# EAGLE board espmarauder_production (EAGLE 9.6.2), part 1 of 2
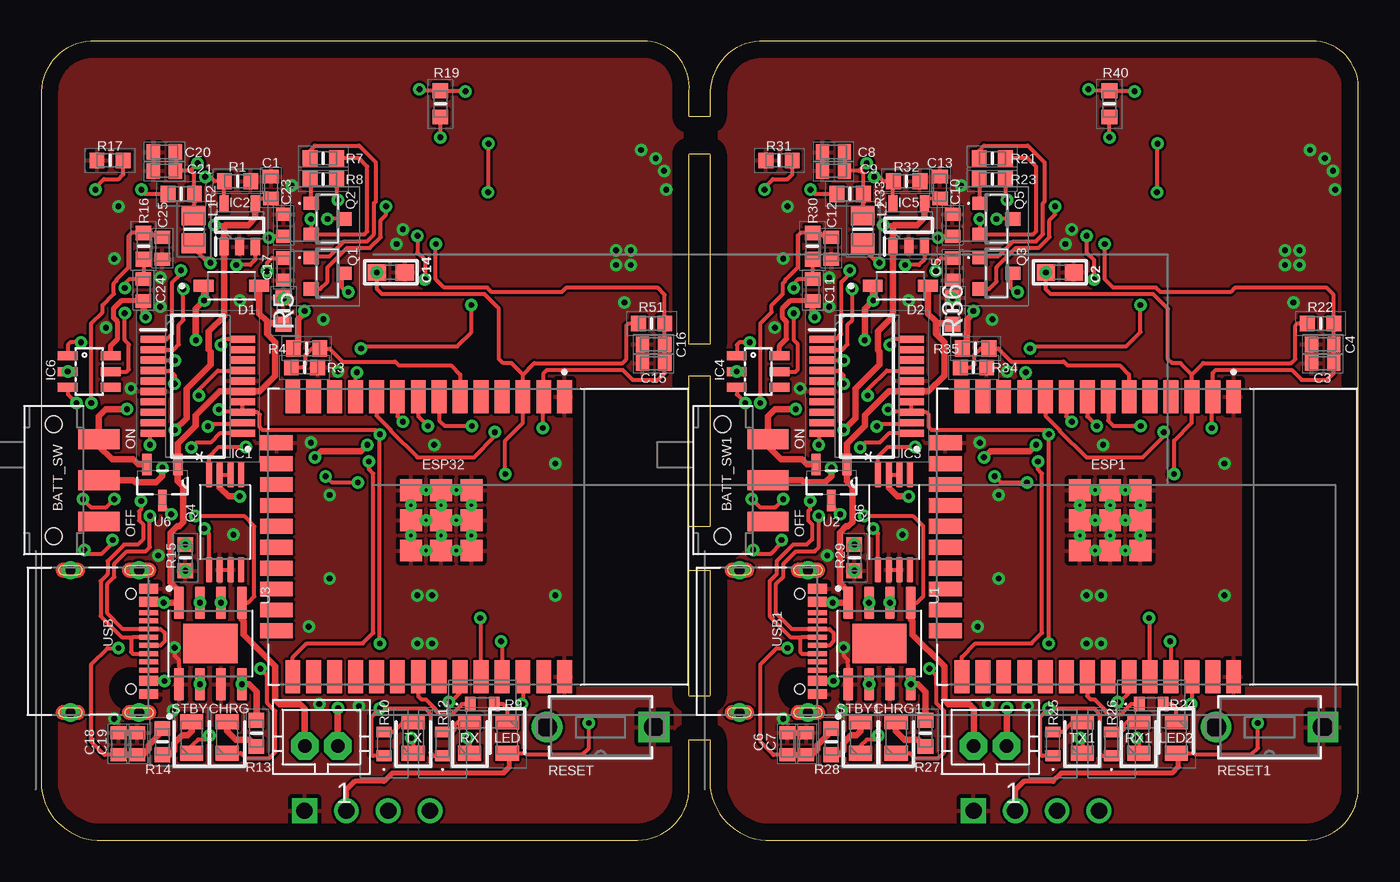
[diagram p0: board, top side]
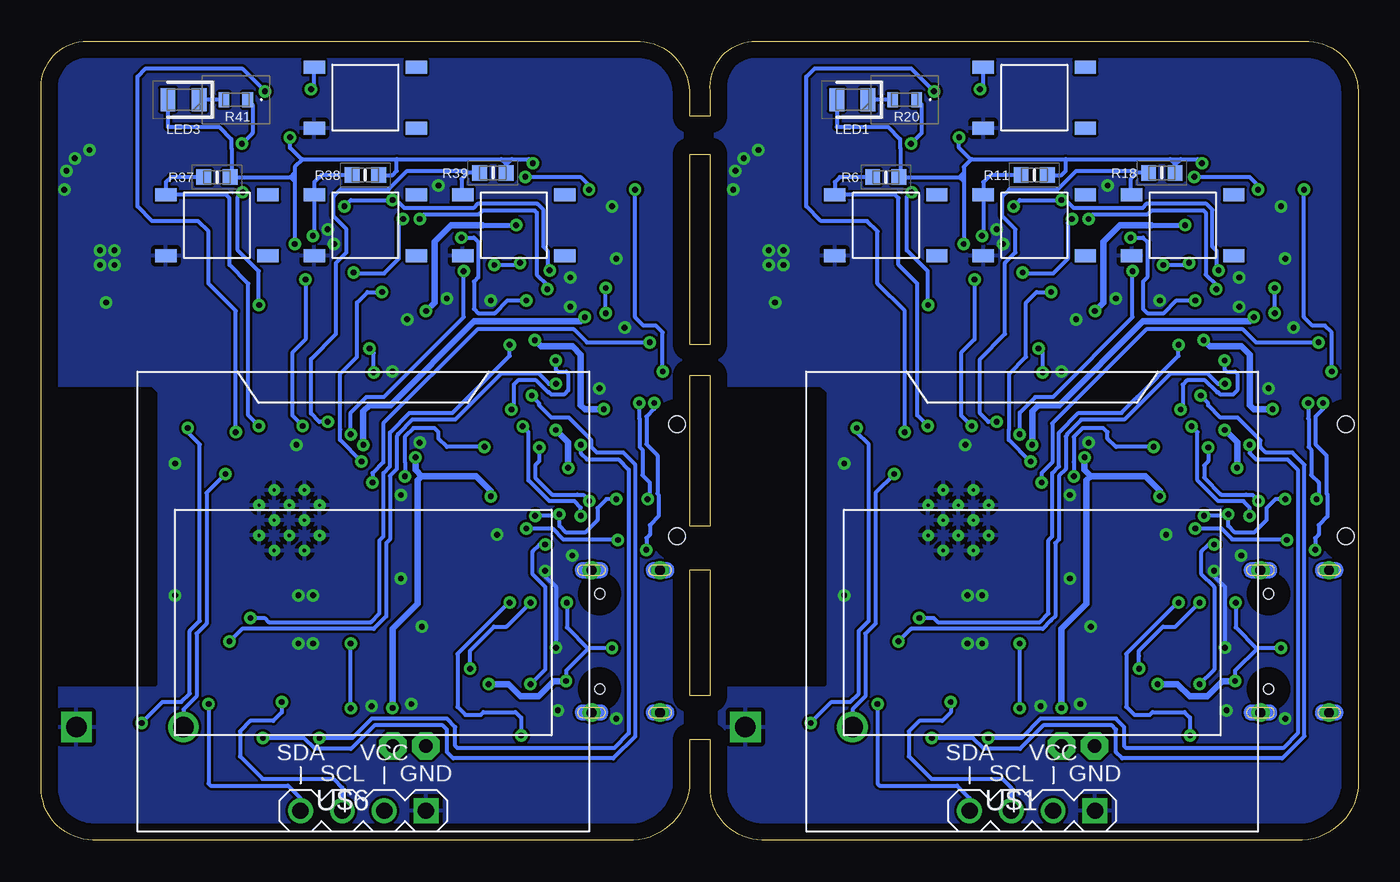
[diagram p1: board, bottom side, seen from below]

Size 80.02 x 48.54 mm. Coordinates in mm from the lower left corner, seen from the top.
Outline: 0,45.49 0,3.2 arc90 4.06,0.03 35.94,0.03 arc90 39.37,2.95 39.37,6.12 40.64,6.12 40.64,3.2 arc90 44.7,0.03 76.58,0.03 arc90 80.01,2.95 80.01,45.49 arc90 77.47,48.54 43.94,48.54 arc90 40.64,45.49 40.64,43.97 39.37,43.97 39.37,45.49 arc90 36.83,48.54 3.3,48.54 arc90 0,45.49
Outline: 39.37,8.79 39.37,16.41 40.64,16.41 40.64,8.79 39.37,8.79
Outline: 39.37,19.08 39.37,28.22 40.64,28.22 40.64,19.08 39.37,19.08
Outline: 39.37,30.12 39.37,41.68 40.64,41.68 40.64,30.12 39.37,30.12
Copper layers (1*16): Top 0.035mm / dielectric 1.5mm / Bottom 0.035mm
Design rules "default *": minimum track width 6mil, minimum drill 0.35mm, track to track 6mil, track to pad 6mil, pad to pad 6mil, via to via 6mil, smd to smd 6mil, copper to edge 40mil, drill to drill 6mil, minimum pad ring 10mil, minimum via ring 8mil, stop-mask expansion 4mil, vias tented up to drill 0.36mm, thermal gap 10mil
Net classes: 1 highpower: width 0.406 mm, drill 0.483 mm

## Footprints (pad centres in the part's own frame; a part is rotated, then mirrored left to right if it is on the bottom)
SW_JS102011SAQN = smd 1.2 x 2.5: 1 -2.5,2.75; 2 0,2.75; 3 2.5,2.75 | hole 1: -3.4,0; 3.4,0
CAPC1608X87N = smd 0.8 x 0.94: 1 -0.67,0; 2 0.67,0
0603 = smd 1.1 x 1: 1 -0.85,0; 2 0.85,0
LEDC2012X80N = smd 0.9 x 1.4: 1 -0.95,0; 2 0.95,0
SOD3715X145N = smd 1.21 x 0.73: A 1.68,0; C -1.68,0
MODULE_ESP32-WROOM-32D = smd 2 x 0.9: 1 -8.5,5.26; 2 -8.5,3.99; 3 -8.5,2.72; 4 -8.5,1.45; 5 -8.5,0.18; 6 -8.5,-1.09; 7 -8.5,-2.36; 8 -8.5,-3.63; 9 -8.5,-4.9; 10 -8.5,-6.17; 11 -8.5,-7.44; 12 -8.5,-8.71; 13 -8.5,-9.98; 14 -8.5,-11.25; 25 8.5,-11.25; 26 8.5,-9.98; 27 8.5,-8.71; 28 8.5,-7.44; 29 8.5,-6.17; 30 8.5,-4.9; 31 8.5,-3.63; 32 8.5,-2.36; 33 8.5,-1.09; 34 8.5,0.18; 35 8.5,1.45; 36 8.5,2.72; 37 8.5,3.99; 38 8.5,5.26 | smd 0.9 x 2: 15 -5.715,-12.25; 16 -4.445,-12.25; 17 -3.175,-12.25; 18 -1.905,-12.25; 19 -0.635,-12.25; 20 0.635,-12.25; 21 1.905,-12.25; 22 3.175,-12.25; 23 4.445,-12.25; 24 5.715,-12.25 | smd 1.33 x 1.33: 39_1 -2.835,-0.405; 39_2 -1,-0.405; 39_3 0.835,-0.405; 39_4 -2.835,-2.24; 39_5 -1,-2.24; 39_6 0.835,-2.24; 39_7 -2.835,-4.075; 39_8 -1,-4.075; 39_9 0.835,-4.075 | drill 0.2 pad 0.3: 39_10 -1.917,-0.405; 39_11 -0.083,-0.405; 39_12 -2.835,-1.323; 39_13 -1,-1.323; 39_14 0.835,-1.323; 39_15 -1.917,-2.24; 39_16 -0.083,-2.24; 39_17 -2.835,-3.158; 39_18 -1,-3.158; 39_19 0.835,-3.158; 39_20 -1.917,-4.075; 39_21 -0.083,-4.075
SOP64P599X175-20N = smd 1.526 x 0.435: 1 -2.712,2.858; 2 -2.712,2.222; 3 -2.712,1.588; 4 -2.712,0.952; 5 -2.712,0.318; 6 -2.712,-0.318; 7 -2.712,-0.952; 8 -2.712,-1.588; 9 -2.712,-2.222; 10 -2.712,-2.858; 11 2.712,-2.858; 12 2.712,-2.222; 13 2.712,-1.588; 14 2.712,-0.952; 15 2.712,-0.318; 16 2.712,0.318; 17 2.712,0.952; 18 2.712,1.588; 19 2.712,2.222; 20 2.712,2.858
SOT95P280X100-5N = smd 1.05 x 0.55: 1 -1.3,0.95; 2 -1.3,0; 3 -1.3,-0.95; 4 1.3,-0.95; 5 1.3,0.95
SOT23-6 = smd 0.55 x 1.2: 1 -0.95,-1.3; 2 0,-1.3; 3 0.95,-1.3; 4 0.95,1.3; 5 0,1.3; 6 -0.95,1.3
INDC2012X105N = smd 1.2 x 1.45: 1 -0.85,0; 2 0.85,0
JST-PH2 = drill 0.813 pad 1.676 octagon: 1 1,0; 2 -1,0
SI2305TP = smd 0.8 x 0.9: 1 -0.95,-1; 2 0.95,-1; 3 0,1
SOP65P640X120-8N = smd 1.56 x 0.4: 1 -2.88,0.975; 2 -2.88,0.325; 3 -2.88,-0.325; 4 -2.88,-0.975; 5 2.88,-0.975; 6 2.88,-0.325; 7 2.88,0.325; 8 2.88,0.975
RESC1608X55N = smd 0.9 x 0.95: 1 -0.8,0; 2 0.8,0
RESC1608X55N' = smd 0.9 x 1: 1 -0.8,0; 2 0.8,0
ERJH3 = smd 0.65 x 0.9: 1 -0.725,0; 2 0.725,0
SWDIP2_256X170P100 = drill 1.245 pad 1.753 square: 1 -6.502,0 | drill 1.245 pad 1.753: 2 0,0
SOP127P600X175-9N = smd 1.97 x 0.6: 1 -2.475,1.905; 2 -2.475,0.635; 3 -2.475,-0.635; 4 -2.475,-1.905; 5 2.475,-1.905; 6 2.475,-0.635; 7 2.475,0.635; 8 2.475,1.905 | smd 2.413 x 3.302: 9 0,0
SOT95P237X112-3N = smd 1.321 x 0.559: 1 -1.092,0.94; 2 -1.092,-0.94 | smd 1.321 x 0.508: 3 1.092,0
DISPLAY-OLED-128X64-I2C = drill 1 square: 1 -3.81,12.7 | drill 1: 2 -1.27,12.7; 3 1.27,12.7; 4 3.81,12.7
BUTTON4X4 = smd 1.3 x 0.8: 1 -3.1,1.85; 2 3.1,1.85; 3 -3.1,-1.85; 4 3.1,-1.85
HRO_TYPE-C-31-M-12 = smd 0.6 x 1.14: A1_B12 -3.2,4.75; A4_B9 -2.4,4.75; B1_A12 3.2,4.75; B4_A9 2.4,4.75 | smd 0.3 x 1.14: A5 -1.25,4.75; A6 -0.25,4.75; A7 0.25,4.75; A8 1.25,4.75; B5 1.75,4.75; B6 0.75,4.75; B7 -0.75,4.75; B8 -1.75,4.75 | drill 0.6 pad 0.9: S1 -4.325,4.17; S2 4.325,4.17; S3 -4.325,0; S4 4.325,0 | hole 0.6: -2.89,3.68; 2.89,3.68

## Placement (x,y rotation side)
BATT_SW  JS102011SAQN  [SW_JS102011SAQN]  0.76,21.87 270 top
BATT_SW1  JS102011SAQN  [SW_JS102011SAQN]  41.4,21.87 270 top
C1  100nf  [CAPC1608X87N]  13.97,39.65 270 top
C2  1uF  [0603]  61.89,34.49 0 top
C3  100nf  [CAPC1608X87N]  77.85,28.98 0 top
C4  10nf  [CAPC1608X87N]  77.85,30.12 0 top
C5  100nf  [CAPC1608X87N]  55.37,34.7 270 top
C6  100nf  [CAPC1608X87N]  45.34,5.87 270 top
C7  100nf  [CAPC1608X87N]  46.48,5.87 90 top
C8  1uf  [CAPC1608X87N]  48.13,41.81 0 top
C9  10nf  [CAPC1608X87N]  48.13,40.67 0 top
C10  100nf  [CAPC1608X87N]  55.37,37.36 270 top
C11  100nf  [CAPC1608X87N]  46.86,33.43 90 top
C12  100nf  [CAPC1608X87N]  48.01,35.97 90 top
C13  100nf  [CAPC1608X87N]  54.61,39.65 270 top
C14  1uF  [0603]  21.25,34.49 0 top
C15  100nf  [CAPC1608X87N]  37.21,28.98 0 top
C16  10nf  [CAPC1608X87N]  37.21,30.12 0 top
C17  100nf  [CAPC1608X87N]  14.73,34.7 270 top
C18  100nf  [CAPC1608X87N]  4.7,5.87 270 top
C19  100nf  [CAPC1608X87N]  5.84,5.87 90 top
C20  1uf  [CAPC1608X87N]  7.49,41.81 0 top
C21  10nf  [CAPC1608X87N]  7.49,40.67 0 top
C23  100nf  [CAPC1608X87N]  14.73,37.36 270 top
C24  100nf  [CAPC1608X87N]  6.22,33.43 90 top
C25  100nf  [CAPC1608X87N]  7.37,35.97 90 top
CHRG  Green  [LEDC2012X80N]  11.3,6.25 90 top
CHRG1  Green  [LEDC2012X80N]  51.94,6.25 90 top
D1  1N5819HW-7  [SOD3715X145N]  11.56,33.68 0 top
D2  1N5819HW-7  [SOD3715X145N]  52.2,33.68 0 top
ESP1  ESP32-WROOM-32D  [MODULE_ESP32-WROOM-32D]  67.18,18.44 270 top
ESP32  ESP32-WROOM-32D  [MODULE_ESP32-WROOM-32D]  26.54,18.44 270 top
IC1  FT231XS-R  [SOP64P599X175-20N]  9.53,27.58 0 top
IC2  M3406-ADJ  [SOT95P280X100-5N]  12.06,37.36 90 top
IC3  FT231XS-R  [SOP64P599X175-20N]  50.16,27.58 0 top
IC4  DW01A  [SOT23-6]  43.56,28.47 270 top
IC5  M3406-ADJ  [SOT95P280X100-5N]  52.71,37.36 90 top
IC6  DW01A  [SOT23-6]  2.92,28.47 270 top
L1  MLF2012A2R2KT000  [INDC2012X105N]  9.27,37.11 90 top
L2  MLF2012A2R2KT000  [INDC2012X105N]  49.91,37.11 90 top
LED  Green  [LEDC2012X80N]  28.32,6.25 270 top
LED1  Green  [LEDC2012X80N]  30.73,44.98 180 bottom
LED2  Green  [LEDC2012X80N]  68.96,6.25 270 top
LED3  Green  [LEDC2012X80N]  71.37,44.98 180 bottom
P1  [JST-PH2]  17.02,5.74 0 top
P2  [JST-PH2]  57.66,5.74 0 top
Q1  MMBT3904-TP  [SI2305TP]  17.4,34.44 270 top
Q2  MMBT3904-TP  [SI2305TP]  17.4,37.74 270 top
Q3  MMBT3904-TP  [SI2305TP]  58.04,34.44 270 top
Q4  FS8205A  [SOP65P640X120-8N]  11.18,19.33 270 top
Q5  MMBT3904-TP  [SI2305TP]  58.04,37.74 270 top
Q6  FS8205A  [SOP65P640X120-8N]  51.82,19.33 270 top
R1  10k  [RESC1608X55N]  11.94,40.03 0 top
R2  40k2  [RESC1608X55N']  8.51,39.27 0 top
R3  10k  [RESC1608X55N]  16,28.73 0 top
R4  40k2  [RESC1608X55N']  16.13,29.87 180 top
R5  10k  [RESC1608X55N]  14.73,32.16 270 top
R6  10k  [RESC1608X55N]  28.7,40.28 0 bottom
R7  10k  [RESC1608X55N]  17.15,40.16 180 top
R8  10k  [RESC1608X55N]  17.15,41.43 180 top
R9  330  [ERJH3]  26.8,8.28 0 top
R10  330  [ERJH3]  20.83,5.87 90 top
R11  10k  [RESC1608X55N]  19.68,40.41 0 bottom
R12  330  [ERJH3]  24.38,5.87 90 top
R13  1k  [RESC1608X55N]  13.08,6.5 270 top
R14  1k  [RESC1608X55N]  7.37,5.99 270 top
R15  1.2k  [RESC1608X55N]  8.76,17.17 90 top
R16  100  [RESC1608X55N]  6.22,36.09 90 top
R17  1k  [RESC1608X55N]  4.19,41.3 0 top
R18  10k  [RESC1608X55N]  11.94,40.54 0 bottom
R19  10k  [RESC1608X55N]  24.26,44.73 270 top
R20  330  [ERJH3]  27.56,44.98 180 bottom
R21  10k  [RESC1608X55N]  57.79,40.16 180 top
R22  10k  [RESC1608X55N]  77.72,31.39 180 top
R23  10k  [RESC1608X55N]  57.79,41.43 180 top
R24  330  [ERJH3]  67.44,8.28 0 top
R25  330  [ERJH3]  61.47,5.87 90 top
R26  330  [ERJH3]  65.02,5.87 90 top
R27  1k  [RESC1608X55N]  53.72,6.5 270 top
R28  1k  [RESC1608X55N]  48.01,5.99 270 top
R29  1.2k  [RESC1608X55N]  49.4,17.17 90 top
R30  100  [RESC1608X55N]  46.86,36.09 90 top
R31  1k  [RESC1608X55N]  44.83,41.3 0 top
R32  10k  [RESC1608X55N]  52.58,40.03 0 top
R33  40k2  [RESC1608X55N']  49.15,39.27 0 top
R34  10k  [RESC1608X55N]  56.64,28.73 0 top
R35  40k2  [RESC1608X55N']  56.77,29.87 180 top
R36  10k  [RESC1608X55N]  55.37,32.16 270 top
R37  10k  [RESC1608X55N]  69.34,40.28 0 bottom
R38  10k  [RESC1608X55N]  60.32,40.41 0 bottom
R39  10k  [RESC1608X55N]  52.58,40.54 0 bottom
R40  10k  [RESC1608X55N]  64.9,44.73 270 top
R41  330  [ERJH3]  68.2,44.98 180 bottom
R51  10k  [RESC1608X55N]  37.08,31.39 180 top
RESET  1825966-1  [SWDIP2_256X170P100]  30.73,6.88 180 top
RESET1  1825966-1  [SWDIP2_256X170P100]  71.37,6.88 180 top
RX  Green  [LEDC2012X80N]  26.03,6.25 90 top
RX1  Green  [LEDC2012X80N]  66.68,6.25 90 top
STBY  Green  [LEDC2012X80N]  9.14,6.25 90 top
STBY1  Green  [LEDC2012X80N]  49.78,6.25 90 top
TX  Green  [LEDC2012X80N]  22.61,6.25 90 top
TX1  Green  [LEDC2012X80N]  63.25,6.25 90 top
U1  TP4056  [SOP127P600X175-9N]  50.93,11.96 90 top
U2  SI2301BDS-T1-E3  [SOT95P237X112-3N]  48.01,21.74 270 top
U3  TP4056  [SOP127P600X175-9N]  10.29,11.96 90 top
U6  SI2301BDS-T1-E3  [SOT95P237X112-3N]  7.37,21.74 270 top
U$1  DISPLAY-OLED-128X64-I2C  [DISPLAY-OLED-128X64-I2C]  19.81,14.5 180 bottom
U$2  BUTTON4X4  [BUTTON4X4]  28.7,37.36 0 bottom
U$3  BUTTON4X4  [BUTTON4X4]  19.68,37.36 0 bottom
U$4  BUTTON4X4  [BUTTON4X4]  10.67,37.36 0 bottom
U$5  BUTTON4X4  [BUTTON4X4]  19.68,45.11 0 bottom
U$6  DISPLAY-OLED-128X64-I2C  [DISPLAY-OLED-128X64-I2C]  60.45,14.5 180 bottom
U$7  BUTTON4X4  [BUTTON4X4]  69.34,37.36 0 bottom
U$8  BUTTON4X4  [BUTTON4X4]  60.32,37.36 0 bottom
U$9  BUTTON4X4  [BUTTON4X4]  51.31,37.36 0 bottom
U$10  BUTTON4X4  [BUTTON4X4]  60.32,45.11 0 bottom
USB  TYPE-C-31-M-12  [HRO_TYPE-C-31-M-12]  1.78,12.09 270 top
USB1  TYPE-C-31-M-12  [HRO_TYPE-C-31-M-12]  42.42,12.09 270 top

## Library data of the parts
BATT_SW BATT_SW1 = JS102011SAQN; AVAILABILITY: In Stock; CHECK_PRICES: https://www.snapeda.com/parts/JS102011SAQN/C%2526K/view-part/?ref=eda; DESCRIPTION: Slide Switch SPDT Surface Mount, Right Angle; MF: C&K; MP: JS102011SAQN; PACKAGE: None; PRICE: None; PURCHASE-URL: https://pricing.snapeda.com/search?q=JS102011SAQN&ref=eda; SNAPEDA_LINK: https://www.snapeda.com/parts/JS102011SAQN/C%2526K/view-part/?ref=snap
C1 C3 C5-C8 C10-C13 C15 C17-C20 C23-C25 = AccesControlNFC; DESCRIPTION: Wurth Elektronik 0603 WCAP-CSGP 100nF Ceramic Multilayer Capacitor, 25 V dc, +125C, X7R Dielectric, +/-10%; DIGIKEY_PARTNUMBER: 732-7989-1-ND; DIGIKEY_PRICE-STOCK: https://www.digikey.com/product-detail/en/w%C3%BCrth-elektronik/885012206071/732-7989-1-ND/5454616; HEIGHT: 0.87mm; MANUFACTURER_NAME: Wurth Elektronik; MANUFACTURER_PART_NUMBER: 885012206071; MOUSER_PART_NUMBER: 710-885012206071; MOUSER_PRICE-STOCK: https://www.mouser.co.uk/ProductDetail/Wurth-Elektronik/885012206071?qs=0KOYDY2FL2%2FEBQkuHgvarg%3D%3D
C2 C14 = microbuilder
C4 C9 C16 C21 = AccesControlNFC; DESCRIPTION: Wurth Elektronik 0603 WCAP-CSGP 10nF Ceramic Multilayer Capacitor, 50 V dc, +125C, X7R Dielectric, +/-10%; DIGIKEY_PARTNUMBER: 732-8007-1-ND; DIGIKEY_PRICE-STOCK: https://www.digikey.com/product-detail/en/w%C3%BCrth-elektronik/885012206089/732-8007-1-ND/5454634; HEIGHT: 0.87mm; MANUFACTURER_NAME: Wurth Elektronik; MANUFACTURER_PART_NUMBER: 885012206089; MOUSER_PART_NUMBER: 710-885012206089; MOUSER_PRICE-STOCK: https://www.mouser.co.uk/ProductDetail/Wurth-Elektronik/885012206089?qs=0KOYDY2FL28GvSbKh319Tw%3D%3D
CHRG CHRG1 LED LED1-LED3 RX RX1 STBY STBY1 TX TX1 = AccesControlNFC; DESCRIPTION: LED,Wurth Elektronik,150080BS75000 Wurth Elektronik 150080BS75000, WL-SMCW Series Blue LED, 470 nm 2012 (0805) Clear, Rectangle Lens SMD package; HEIGHT: 0.8mm; MANUFACTURER_NAME: Wurth Elektronik; MANUFACTURER_PART_NUMBER: 150080BS75000; MOUSER_PART_NUMBER: 710-150080BS75000; MOUSER_PRICE-STOCK: https://www.mouser.co.uk/ProductDetail/Wurth-Elektronik/150080BS75000?qs=2kOmHSv6VfT2tBo3UPVqAQ%3D%3D
D1 D2 = 1N5819HW-7; AVAILABILITY: In Stock; CHECK_PRICES: https://www.snapeda.com/parts/1N5819HW-7/Diodes+Inc./view-part/?ref=eda; DESCRIPTION: Diode Schottky 40 V 1A Surface Mount SOD-123; MF: Diodes Inc.; MP: 1N5819HW-7; PACKAGE: SOD-123 Fairchild Semiconductor; PRICE: None; PURCHASE-URL: https://www.snapeda.com/api/url_track_click_mouser/?unipart_id=51510&manufacturer=Diodes Inc.&part_name=1N5819HW-7&search_term=1n5819; SNAPEDA_LINK: https://www.snapeda.com/parts/1N5819HW-7/Diodes+Inc./view-part/?ref=snap
ESP1 ESP32 = AccesControlNFC; AVAILABILITY: In Stock; DESCRIPTION: Bluetooth, WiFi 802.11b/g/n, Bluetooth v4.2 +EDR, Class 1, 2 and 3 Transceiver Module 2.4GHz ~ 2.5GHz Integrated; MF: Espressif Systems; MP: ESP32-WROOM-32D; PACKAGE: Module Espressif Systems; PRICE: None; PURCHASE-URL: https://pricing.snapeda.com/search/part/ESP32-WROOM-32D/?ref=eda
IC1 IC3 = AccesControlNFC; DESCRIPTION: FTDI Chip FT231XS-R, Interface RS232, RS422, RS485, SIE, UART 3MBd, 5 V, 20-pin, SSOP; HEIGHT: 1.753mm; MANUFACTURER_NAME: FTDI Chip; MANUFACTURER_PART_NUMBER: FT231XS-R; MOUSER_PART_NUMBER: 895-FT231XS-R; MOUSER_PRICE-STOCK: https://www.mouser.co.uk/ProductDetail/FTDI/FT231XS-R?qs=Gp1Yz1mis3WduRPsgrTbtg%3D%3D
IC2 IC5 = M3406; DESCRIPTION: Step-down type SOT-23-5 DC-DC Converters ROHS; HEIGHT: 1mm; LCSC_PART_NUMBER: C83224; LCSC_PRICE-STOCK: https://www.lcsc.com/product-detail/DC-DC-Converters_XI-AN-Aerosemi-Tech-M3406-ADJ_C83224.html; MANUFACTURER_NAME: XI'AN Aerosemi Tech; MANUFACTURER_PART_NUMBER: M3406-ADJ
IC4 IC6 = DW01A; AVAILABILITY: Not in stock; CHECK_PRICES: https://www.snapeda.com/parts/DW01A/Fortune+Semiconductor/view-part/?ref=eda; DESCRIPTION: One Cell Lithium-ion/Polymer Battery Protection IC; MF: Fortune Semiconductor; MP: DW01A; PACKAGE: SOT-23-6 Fortune Semiconductor; PRICE: None; SNAPEDA_LINK: https://www.snapeda.com/parts/DW01A/Fortune+Semiconductor/view-part/?ref=snap
L1 L2 = MLF2012A2R2KT000; DESCRIPTION: 2.2 H Shielded Multilayer Inductor 50 mA 500mOhm Max 0805 (2012 Metric); HEIGHT: 1.05mm; MANUFACTURER_NAME: TDK; MANUFACTURER_PART_NUMBER: MLF2012A2R2KT000; MOUSER_PART_NUMBER: 810-MLF2012A2R2KT000; MOUSER_PRICE-STOCK: https://www.mouser.co.uk/ProductDetail/TDK/MLF2012A2R2KT000?qs=pLY5GE0xrmL3Y2Jw%2FEGjFg%3D%3D
P1 P2 = jst-ph
Q1-Q3 Q5 = AccesControlNFC; DESCRIPTION: Bipolar Transistors - BJT 40V; HEIGHT: mm; MANUFACTURER_NAME: Micro Commercial Components (MCC); MANUFACTURER_PART_NUMBER: MMBT3904-TP; MOUSER_PART_NUMBER: 833-MMBT3904-TP; MOUSER_PRICE-STOCK: https://www.mouser.co.uk/ProductDetail/Micro-Commercial-Components-MCC/MMBT3904-TP?qs=KFo7JewZbUHicjDjIayULQ%3D%3D
Q4 Q6 = FS8205A; AVAILABILITY: Not in stock; CHECK_PRICES: https://www.snapeda.com/parts/FS8205A/Fortune+Semiconductor/view-part/?ref=eda; MF: Fortune Semiconductor; MP: FS8205A; PACKAGE: Package; PRICE: None; SNAPEDA_LINK: https://www.snapeda.com/parts/FS8205A/Fortune+Semiconductor/view-part/?ref=snap
R1 R3 R5-R8 R11 R18 R19 R21-R23 R32 R34 R36-R40 R51 = AccesControlNFC; DESCRIPTION: Thick Film Resistors - SMD 0603 10Kohm 5% Anti Surge AEC-Q200; DIGIKEY_PARTNUMBER: RHM10KDCT-ND; DIGIKEY_PRICE-STOCK: https://www.digikey.com/product-detail/en/rohm-semiconductor/ESR03EZPJ103/RHM10KDCT-ND/1762925; HEIGHT: 0.55mm; MANUFACTURER_NAME: ROHM Semiconductor; MANUFACTURER_PART_NUMBER: ESR03EZPJ103; MOUSER_PART_NUMBER: 755-ESR03EZPJ103; MOUSER_PRICE-STOCK: https://www.mouser.com/Search/Refine.aspx?Keyword=755-ESR03EZPJ103
R2 R4 R33 R35 = ERJ-S03F4022V; DESCRIPTION: Thick Film Resistors - SMD 0603 40.2Kohms 1% Anti-Sulfur; HEIGHT: 0.55mm; MANUFACTURER_NAME: Panasonic; MANUFACTURER_PART_NUMBER: ERJ-S03F4022V; MOUSER_PART_NUMBER: 667-ERJ-S03F4022V; MOUSER_PRICE-STOCK: https://www.mouser.com/Search/Refine.aspx?Keyword=667-ERJ-S03F4022V
R9 R10 R12 R20 R24-R26 R41 = AccesControlNFC; DESCRIPTION: Power Rating 0.125W,Resistance 330 Ohm,LxW(EIA) 1.6 x 0.8 (EIA:0603) mm; HEIGHT: mm; MANUFACTURER_NAME: Panasonic; MANUFACTURER_PART_NUMBER: ERJ-H3EF3300V; MOUSER_PART_NUMBER: 667-ERJ-H3EF3300V; MOUSER_PRICE-STOCK: https://www.mouser.co.uk/ProductDetail/Panasonic/ERJ-H3EF3300V?qs=eP2BKZSCXI61roRLPi8W7w%3D%3D
R13-R17 R27-R31 = AccesControlNFC; DESCRIPTION: Thick Film Resistors - SMD 0603 1Kohm 5% Anti Surge AEC-Q200; DIGIKEY_PARTNUMBER: RHM1.0KDCT-ND; DIGIKEY_PRICE-STOCK: https://www.digikey.com/product-detail/en/rohm-semiconductor/ESR03EZPJ102/RHM1-0KDCT-ND/1762924; HEIGHT: 0.55mm; MANUFACTURER_NAME: ROHM Semiconductor; MANUFACTURER_PART_NUMBER: ESR03EZPJ102; MOUSER_PART_NUMBER: 755-ESR03EZPJ102; MOUSER_PRICE-STOCK: https://www.mouser.co.uk/ProductDetail/ROHM-Semiconductor/ESR03EZPJ102?qs=DyUWGjl%252BcVvjMuV%252BzioV7Q%3D%3D
RESET RESET1 = Switches; BUILT_BY: EMA_UL_Team; CATEGORY: Tactile Switches; COPYRIGHT: Copyright (C) 2016 Accelerated Designs. All rights reserved; DESCRIPTION: FSMCH=3.5 X 6.0 X 4.3 TACT SWITCH, HT; MANUFACTURER_PART_NUMBER: 1825966-1; PART_STATUS: active; SERIES: Unknown; VENDOR: TE Connectivity
U1 U3 = TP4056; AVAILABILITY: Not in stock; CHECK_PRICES: https://www.snapeda.com/parts/TP4056/NanJing+Top+Power+ASIC+Corp./view-part/?ref=eda; DESCRIPTION: Complete single cell Li-Ion battery with a constant current / constant voltage linear charger; MF: NanJing Top Power ASIC Corp.; MP: TP4056; PACKAGE: Package; PRICE: None; SNAPEDA_LINK: https://www.snapeda.com/parts/TP4056/NanJing+Top+Power+ASIC+Corp./view-part/?ref=snap
U2 U6 = SI2301BDS-T1-E3; AVAILABILITY: In Stock; CHECK_PRICES: https://www.snapeda.com/parts/SI2301BDS-T1-E3/Vishay+Siliconix/view-part/?ref=eda; DESCRIPTION: MOSFET,P-Ch,VDSS -20V,RDS(ON) 0.08Ohm,ID -2.2A,TO-236 (SOT-23),PD 0.7W,VGS +/-8V | Siliconix / Vishay SI2301BDS-T1-E3; MF: Vishay; MP: SI2301BDS-T1-E3; PACKAGE: SOT-23-3 Vishay Siliconix; PRICE: None; PURCHASE-URL: https://www.snapeda.com/api/url_track_click_mouser/?unipart_id=277675&manufacturer=Vishay&part_name=SI2301BDS-T1-E3&search_term=si2301; SNAPEDA_LINK: https://www.snapeda.com/parts/SI2301BDS-T1-E3/Vishay+Siliconix/view-part/?ref=snap
U$1 U$6 = diy-modules
U$2-U$5 U$7-U$10 = 4x4mm_Push_Button
USB USB1 = TYPE-C-31-M-12; AVAILABILITY: Not in stock; CHECK_PRICES: https://www.snapeda.com/parts/TYPE-C-31-M-12/HRO+Electronics+Co.%252C+Ltd./view-part/?ref=eda; DESCRIPTION: USB Connectors 24 Receptacle 1 8.94*7.3mm RoHS; MF: HRO Electronics Co., Ltd.; MP: TYPE-C-31-M-12; PACKAGE: Package; PRICE: None; SNAPEDA_LINK: https://www.snapeda.com/parts/TYPE-C-31-M-12/HRO+Electronics+Co.%252C+Ltd./view-part/?ref=snap

## Nets
0: ESP32.25 Q1.3
1: ESP1.25 Q3.3
3.3V: C15.2 C16.2 C20.2 C21.2 ESP32.2 L1.2 LED1.2 LED.2 R2.2 R6.2 R11.2 R18.2 R19.2 R51.1 U$1.2
3.3V1: C3.2 C4.2 C8.2 C9.2 ESP1.2 L2.2 LED2.2 LED3.2 R22.1 R33.2 R37.2 R38.2 R39.2 R40.2 U$6.2
+5V: BATT_SW.2 C1.2 IC2.1 IC2.4 R4.2
+5V1: BATT_SW1.2 C13.2 IC5.1 IC5.4 R35.2
BUTTON1: ESP32.30
BUTTON2: ESP1.30
CBUS1: IC1.17 RX.1
CBUS2: IC1.10 TX.1
CBUS3: IC3.17 RX1.1
CBUS4: IC3.10 TX1.1
CHRG: CHRG.1 U3.7
CHRG1: CHRG1.1 U1.7
D1: ESP1.6 R34.1 R35.1
D2: ESP1.7 R37.1 U$7.1
D3: ESP1.8 R38.1 U$8.1
D4: ESP1.9 R39.1 U$9.1
D5: ESP32.29
D6: ESP1.10 R40.1 U$10.1
D7: ESP1.12
D8: ESP1.37
D9: ESP1.29
D23: ESP32.37
D25: ESP32.10 R19.1 U$5.1
D27: ESP32.12
D32: ESP32.8 R11.1 U$3.1
D33: ESP32.9 R18.1 U$4.1
D34: ESP32.6 R3.1 R4.1
D35: ESP32.7 R6.1 U$2.1
D+: IC1.11 USB.A6 USB.B6
D+1: IC3.11 USB1.A6 USB1.B6
D-: IC1.12 USB.A7 USB.B7
D-1: IC3.12 USB1.A7 USB1.B7
DTR: IC1.1 Q1.2 R7.1
DTR1: IC3.1 Q3.2 R21.1
EN: C14.1 ESP32.3 Q2.3 R51.2 RESET.2
EN1: C2.1 ESP1.3 Q5.3 R22.2 RESET1.2
GND: C1.1 C14.2 C15.1 C16.1 C17.2 C18.1 C19.2 C20.1 C21.1 C23.1 C25.1 ESP32.1 ESP32.15 ESP32.38 ESP32.39_1 ESP32.39_2 ESP32.39_3 ESP32.39_4 ESP32.39_5 ESP32.39_6 ESP32.39_7 ESP32.39_8 ESP32.39_9 ESP32.39_10 ESP32.39_11 ESP32.39_12 ESP32.39_13 ESP32.39_14 ESP32.39_15 ESP32.39_16 ESP32.39_17 ESP32.39_18 ESP32.39_19 ESP32.39_20 ESP32.39_21 IC1.6 IC1.16 IC2.2 Q4.6 Q4.7 R1.2 R3.2 R5.1 R15.1 R17.1 RESET.1 U3.1 U3.3 U$1.1 U$2.3 U$3.3 U$4.3 U$5.3 USB.A1_B12 USB.B1_A12
GND1: C2.2 C3.1 C4.1 C5.2 C6.1 C7.2 C8.1 C9.1 C10.1 C12.1 C13.1 ESP1.1 ESP1.15 ESP1.38 ESP1.39_1 ESP1.39_2 ESP1.39_3 ESP1.39_4 ESP1.39_5 ESP1.39_6 ESP1.39_7 ESP1.39_8 ESP1.39_9 ESP1.39_10 ESP1.39_11 ESP1.39_12 ESP1.39_13 ESP1.39_14 ESP1.39_15 ESP1.39_16 ESP1.39_17 ESP1.39_18 ESP1.39_19 ESP1.39_20 ESP1.39_21 IC3.6 IC3.16 IC5.2 Q6.6 Q6.7 R29.1 R31.1 R32.2 R34.2 R36.1 RESET1.1 U1.1 U1.3 U$6.1 U$7.3 U$8.3 U$9.3 U$10.3 USB1.A1_B12 USB1.B1_A12
LED: ESP32.31 R9.1
LED1: ESP1.11 R41.1
LED2: ESP32.11 R20.1
LED3: ESP1.31 R24.1
N$1: IC2.3 L1.1
N$2: LED.1 R9.2
N$3: IC2.5 R1.1 R2.1
N$4: LED1.1 R20.2
N$5: Q5.1 R21.2
N$6: Q3.1 R23.2
N$7: R26.2 RX1.2
N$8: R25.2 TX1.2
N$9: Q2.1 R7.2
N$10: CHRG1.2 R27.2
N$11: Q1.1 R8.2
N$12: R12.2 RX.2
N$13: R10.2 TX.2
N$14: R28.2 STBY1.2
N$15: CHRG.2 R13.2
N$16: R14.2 STBY.2
N$17: R29.2 U1.2
N$18: R15.2 U3.2
N$19: C24.2 IC6.5 R16.1
N$20: IC6.1 Q4.4
N$21: IC6.2 R17.2
N$22: C11.2 IC4.5 R30.1
N$23: IC4.1 Q6.4
N$24: IC4.2 R31.2
N$25: IC4.3 Q6.5
N$26: IC6.3 Q4.5
N$27: IC5.3 L2.1
N$28: IC5.5 R32.1 R33.1
N$29: LED2.1 R24.2
N$30: LED3.1 R41.2
RTS: IC1.2 Q2.2 R8.1
RTS1: IC3.2 Q5.2 R23.1
RX_DWM: ESP32.28
RX_DWM1: ESP1.28
SCL: ESP32.36 U$1.4
SCL1: ESP1.36 U$6.4
SD_HOST_CLK: ESP32.13
SD_HOST_CLK1: ESP1.13
SD_HOST_CMD: ESP32.23
SD_HOST_CMD1: ESP1.23
SD_HOST_D0: ESP32.24
SD_HOST_D1: ESP32.26
SD_HOST_D2: ESP32.14
SD_HOST_D3: ESP32.16
SD_HOST_D4: ESP1.24
SD_HOST_D5: ESP1.26
SD_HOST_D6: ESP1.16
SD_HOST_D7: ESP1.14
SDA: ESP32.33 U$1.3
SDA1: ESP1.33 U$6.3
STBY: STBY.1 U3.6
STBY1: STBY1.1 U1.6
TX_DWM: ESP32.27
TX_DWM1: ESP1.27
U0RXD: ESP32.34 IC1.20
U0RXD1: ESP1.34 IC3.20
U0TXD: ESP32.35 IC1.4
U0TXD1: ESP1.35 IC3.4
V+: BATT_SW.1 C23.2 D1.C U6.2
V+1: BATT_SW1.1 C10.2 D2.C U2.2
VBAT+: C25.2 P1.2 R16.2 U3.5 U6.3
VBAT+1: C12.2 P2.2 R30.2 U1.5 U2.3
VBAT-: C24.1 IC6.6 P1.1 Q4.2 Q4.3
VBAT-1: C11.1 IC4.6 P2.1 Q6.2 Q6.3
VBUS: C18.2 C19.1 D1.A IC1.15 R5.2 R13.1 R14.1 U3.4 U3.8 U6.1 USB.A4_B9 USB.B4_A9
VBUS1: C6.2 C7.1 D2.A IC3.15 R27.1 R28.1 R36.2 U1.4 U1.8 U2.1 USB1.A4_B9 USB1.B4_A9
VCC: C17.1 IC1.3 IC1.13 IC1.14 R10.1 R12.1
VCC1: C5.1 IC3.3 IC3.13 IC3.14 R25.1 R26.1
VN: ESP32.5
VN1: ESP1.5
VP: ESP32.4
VP1: ESP1.4